# Altium PCB Strathim PCB V1.0 (1 try).PcbDoc (part 2 of 2)
Units mm, origin at the board's own origin, x right, y up, seen from the top; angles counter-clockwise.
Board outline 35 x 35 mm, 6 copper layers (Component Side, Ground Plane (GND), Inner Layer 1, Inner Layer 2, Power Plane (VCC), Solder Side), stack 1.297 mm thick; 113 components, 148 nets, 686 pads, 197 vias.
Unrouted connection lines stored in the file: 260.
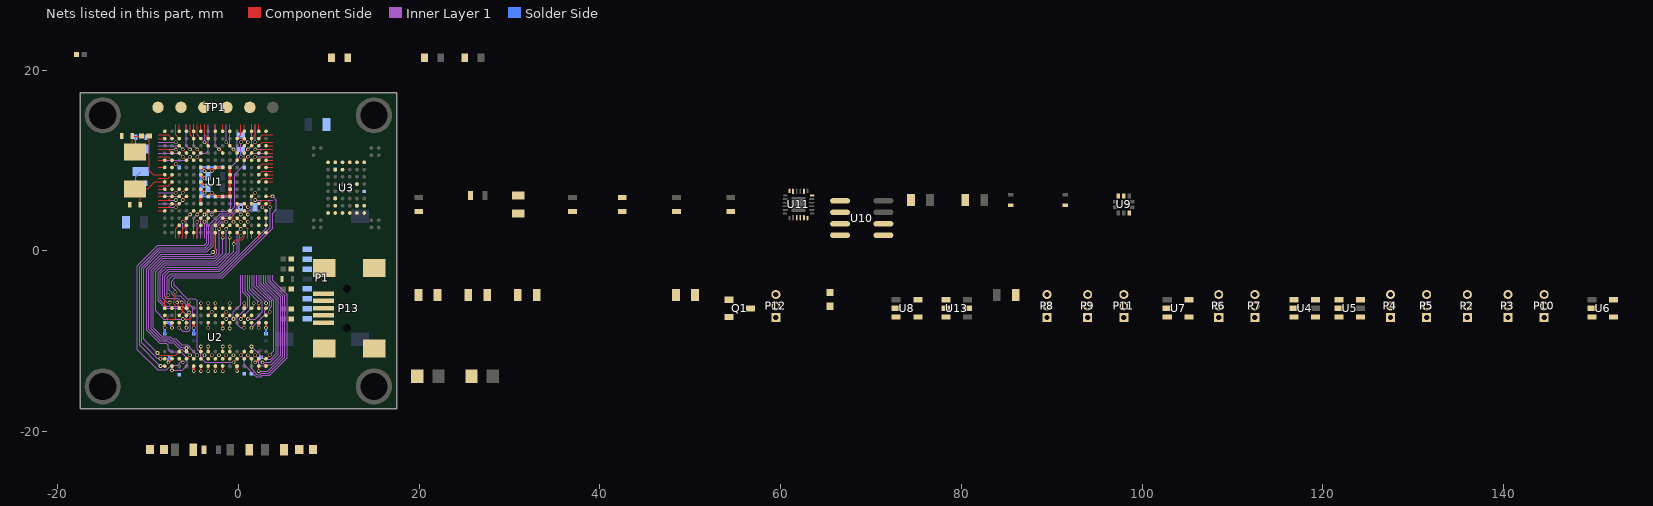
[diagram p5: the nets of this part, all layers, seen from the top]

## Via types
v1: diameter 0.4, hole 0.25, Component Side to Solder Side, tented both sides, 183 vias
v2: diameter 0.4, hole 0.25, Component Side to Solder Side, 14 vias

## Nets (pads, with @x,y where several pads share a name; then routed paths per layer and width w, separated by ;. In a path a pad name is that pad's centre, name@x,y a point inside that pad or via, vN(x,y) a via of type N, cw(c..) or ccw(c..) an arc to the next point about the centre after c; other vN are vias at no path point) (continued)
GND: C1.1 C2.1 C3.1 C4.1 C5.1 C6.1 C7.2 C8.1 C9.1 C10.1 C11.1 C12.1 C13.1 C14.1 C15.1 C16.1 C17.1 C18.1 C19.1 C20.1 C21.1 C22.1 C23.1 C24.1 C25.1 C26.1 C27.1 C28.1 C29.1 C30.2 C31.2 C32.2 C33.2 C34.1 C35.1 C36.1 C37.1 C38.1 C39.1 C40.1 C41.1 C42.1 C43.1 C44.1 C45.1 C46.1 C47.1 C48.1 C49.1 C50.1 C51.1 C52.1 C53.1 C54.1 C55.1 C56.1 C57.1 C58.1 C59.1 C60.1 C61.1 C62.1 J1.1 J2.1 P1.3 P2.3 P3.3 P4.3 P5.3 P6.3 P7.3 P8.3 P9.3 P10.3 P11.3 P12.3 P13.5 P13.6 P13.7 P13.8 P13.9 Q1.2 R3.1 TP1.3 U1.F2 U1.F6 U1.F7 U1.F8 U1.F9 U1.F10 U1.G6 U1.G10 U1.H6 U1.H10 U1.J6 U1.J10 U1.K6 U1.K7 U1.K8 U1.K9 U1.K10 U1.L6 U1.M1 U2.A3 U2.B3 U2.B8 U2.C1 U2.D1 U2.E9 U2.F1 U2.L3 U2.L9 U2.M1 U2.N1 U2.P3 U2.P8 U2.R3 U3.C5 U3.F7 U3.K3 U3.K8 U4.2 U5.2 U6.4 U7.4 U8.4 U9.3 U9.8 U9.9 U10.1 U10.2 U10.3 U10.4 U11.9 U11.11 U11.18 U11.20 U13.2 | length 44.2
  Component Side w0.12: -8.86,4.42 U1.M1@-8.22,4.42 ; U1.F2@-7.34,9.22 v1(-6.94,9.62) ; v1(-6.78,-5.71) -6.64,-5.85 -6.64,-6.25 U2.N1@-6.54,-6.35 ; U2.F1@-0.94,-6.35 v1(-0.94,-5.79) ; U2.C1@1.46,-6.35 1.7,-6.11 v1(1.7,-5.79)
  Component Side w0.254: v1(-8.14,-8.51) U2.R3@-8.14,-7.95 ; v1(-7.74,-12.35) U2.P8@-7.34,-11.95 ; v1(-7.34,-8.51) U2.P3@-7.34,-7.95 ; U2.M1@-5.74,-6.35 -5.415,-6.025 -5.5,-5.94 v1(-5.5,-5.7) ; v1(-4.94,-13.31) U2.L9@-4.94,-12.75 ; v1(-4.94,-8.51) U2.L3@-4.94,-7.95 ; U1.L6@-4.14,5.22 U1.K6@-4.14,6.02 ; U1.J6@-4.14,6.82 v1(-3.74,6.42) ; U1.H6@-4.14,7.62 v1(-3.74,7.22) ; U1.G6@-4.14,8.42 v1(-3.74,8.02) ; U1.F6@-4.14,9.22 v1(-3.74,8.82) ; U1.K7@-3.34,6.02 v1(-2.94,6.42) U1.K8@-2.54,6.02 U1.K9@-1.74,6.02 U1.K10@-0.94,6.02 U1.J10@-0.94,6.82 U1.H10@-0.94,7.62 U1.G10@-0.94,8.42 U1.F10@-0.94,9.22 ; U1.F7@-3.34,9.22 v1(-2.94,8.82) U1.F8@-2.54,9.22 U1.F9@-1.74,9.22 ; v1(-0.14,-13.31) U2.E9@-0.14,-12.75 ; U2.D1@0.66,-6.35 0.66,-5.87 v1(0.66,-5.79) ; v1(1.86,-12.35) U2.B8@2.26,-11.95 ; v1(2.26,-8.51) U2.B3@2.26,-7.95 ; v1(3.06,-8.51) U2.A3@3.06,-7.95
  Solder Side w0.12: v1(-6.94,9.62) -6.92,9.62 C26.1@-6.52,9.22
  Solder Side w0.254: C47.1@-8.14,-9.17 v1(-8.14,-8.51) ; v1(-7.74,-12.35) -7.74,-11.93 C46.1@-7.58,-11.77 ; C51.1@-7.74,-7.93 -7.34,-8.33 v1(-7.34,-8.51) ; C50.1@-5.74,-6.33 -5.415,-6.005 -5.5,-5.92 v1(-5.5,-5.7) ; C44.1@-4.96,-12.75 -4.96,-13.29 v1(-4.94,-13.31) ; C43.1@-4.94,-9.17 v1(-4.94,-8.51) ; C25.1@-4.16,5.22 -4.16,6 C20.1@-4.14,6.02 ; v1(-3.74,6.42) C20.1@-4.14,6.02 ; v1(-3.74,7.22) -4.14,6.82 C19.1@-4.16,6.82 ; v1(-3.74,8.02) -4.14,8.42 C27.1@-4.16,8.42 ; v1(-3.74,8.82) -4.14,9.22 C13.1@-4.16,9.22 ; C21.1@-3.34,6 C21.1@-3.34,6.02 ; v1(-2.94,6.42) C21.1@-3.34,6.02 ; C10.1@-1.74,9.24 C11.1@-2.54,9.24 C12.1@-3.34,9.24 -4.14,9.24 C13.1@-4.16,9.22 ; C9.1@-0.94,9.24 -0.92,9.22 C17.1@-0.92,8.42 C16.1@-0.92,7.62 C15.1@-0.92,6.82 C14.1@-0.92,6.02 C21.1@-3.34,6.02 ; v1(-0.14,-13.31) C42.1@-0.14,-12.83 ; C49.1@0.64,-6.35 0.66,-6.33 v1(0.66,-5.79) ; v1(1.86,-12.35) 1.92,-12.35 C39.1@2.5,-11.77 ; v1(2.26,-8.51) C48.1@2.26,-7.93 ; C38.1@3.06,-9.17 v1(3.06,-8.51) ; C19.1@-4.16,6.82 C28.1@-4.16,7.62 C27.1@-4.16,8.42 ; C19.1@-4.16,6.82 C20.1@-4.16,6.02 C20.1@-4.14,6.02 ; C27.1@-4.16,8.42 C13.1@-4.16,9.22 ; C20.1@-4.14,6.02 C21.1@-3.34,6.02
I2C1_SCL: R13.1 U10.6 U11.23
I2C1_SDA: R14.1 U10.5 U11.24
MAG_INT: 
MCU_TDI: U1.A13 | length 0.7
  Component Side w0.12: U1.A13@1.46,13.22 1.46,13.94
MPU9250_INT: U11.12
NAND_ALE: U1.M10 U3.C4 | length 1.4
  Component Side w0.12: U1.M10@-0.94,4.42 -0.54,4.02 v1(-0.54,3.22)
NAND_CLE: U1.N10 U3.D5
NAND_NCE: U1.D9 U3.C6 | length 3.5
  Component Side w0.12: v1(-2.14,11.22) U1.D9@-1.74,10.82
  Inner Layer 1 w0.12: -2.54,13.94 -2.54,11.62 v1(-2.14,11.22)
NAND_NR/B: U1.B11 U3.C8 | length 1.7
  Component Side w0.12: U1.B11@-0.14,12.42 0.26,12.82 0.26,13.94
NAND_NRE: U1.D11 U3.D4 | length 3.5
  Component Side w0.12: v1(-0.54,11.22) U1.D11@-0.14,10.82
  Inner Layer 1 w0.12: -0.94,13.94 -0.94,11.62 v1(-0.54,11.22)
NAND_NWE: U1.C10 U1.J3 U2.K8 U3.C7 | length 5.5
  Component Side w0.12: v1(-6.94,6.42) U1.J3@-6.54,6.82 ; U2.K8@-4.14,-11.95 v1(-3.74,-11.55) ; v1(-1.34,12.02) U1.C10@-0.94,11.62
  Inner Layer 1 w0.12: -8.86,6.42 v1(-6.94,6.42) ; v1(-1.34,12.02) -1.34,13.94
NAND_NWP: U1.M12 U3.C3 | length 0.6
  Component Side w0.12: U1.M12@0.66,4.42 v1(1.06,4.02)
NetC1_2: C1.2 U1.E1 X1.1 | length 2.3
  Component Side w0.12: -8.86,10.02 U1.E1@-8.14,10.02
  Solder Side w0.12: C1.2@-11.375,12.573 -11.375,11.855 X1.1@-10.795,11.275
NetC2_2: C2.2 U1.F1 X1.2 | length 2.2
  Component Side w0.12: -8.86,9.22 U1.F1@-8.14,9.22
  Solder Side w0.12: C2.2@-11.375,7.493 -11.375,8.195 X1.2@-10.795,8.775
NetC3_2: C3.2 U1.H1 X2.1 | length 4.9
  Component Side w0.12: C3.2@-10.85,5.08 -10.85,6.768 -10.922,6.84 -10.051,6.84 -9.271,7.62 U1.H1@-8.14,7.62
NetC4_2: C4.2 R4.2 X2.2 | length 2.9
  Component Side w0.12: X2.2@-11.43,10.94 -11.739,11.249 C4.2@-11.739,12.7 R4.2@-10.712,12.7
NetC6_2: C6.2 U1.L11 | length 0.6
  Component Side w0.12: U1.L11@-0.14,5.22 v1(0.26,4.82)
NetC8_2: C8.2 U1.E11 | length 1.4
  Component Side w0.12: U1.E11@-0.14,10.02 v1(0.26,10.42)
  Solder Side w0.12: v1(0.26,10.42) C8.2@0.26,11.22
NetC59_2: C59.2 U11.10
NetC62_2: C62.2
NetJ1_2: J1.2 R11.2 U1.E5 | length 4.3
  Component Side w0.12: v1(-5.34,10.42) U1.E5@-4.94,10.02
  Inner Layer 1 w0.12: -8.86,10.02 -5.74,10.02 v1(-5.34,10.42)
NetJ2_2: J2.2 R12.2 U1.E6 | length 4.9
  Component Side w0.12: v1(-4.54,10.42) U1.E6@-4.14,10.02
  Inner Layer 1 w0.12: v1(-4.54,10.42) -4.14,10.82 -3.603,10.82 -3.34,11.083 -3.34,13.94
NetLED6_1: LED6.1 Q1.1
NetLED6_2: LED6.2 R15.2
NetP10_1: P10.1 U6.2
NetP11_1: P11.1 U7.2
NetP12_1: P12.1 U8.2
NetP13_4: P13.4 R19.2
NetQ1_3: Q1.3 R16.1
NetR4_1: R4.1 U1.G1 | length 5.8
  Component Side w0.12: R4.1@-9.862,12.7 -9.862,8.846 -9.436,8.42 -8.86,8.42 U1.G1@-8.14,8.42
NRESET: TP1.5 U1.J1 | length 0.7
  Component Side w0.12: -8.86,6.82 U1.J1@-8.14,6.82
QUADSPI_BK1_IO0: U1.L3 | length 2.4
  Component Side w0.12: v1(-6.94,4.82) U1.L3@-6.54,5.22
  Inner Layer 1 w0.12: -8.86,4.82 v1@-7.02,4.82
QUADSPI_BK1_IO1: U1.L2 | length 1.6
  Component Side w0.12: -8.86,4.82 -7.82,4.82 ; -7.74,4.82 U1.L2@-7.34,5.22
QUADSPI_BK1_IO2: U1.A3 | length 0.7
  Component Side w0.12: U1.A3@-6.54,13.22 -6.54,13.94
QUADSPI_BK1_IO3: U1.M11 | length 0.6
  Component Side w0.12: U1.M11@-0.14,4.42 v1(0.26,4.02)
QUADSPI_CLK: U1.M5 | length 3.4
  Component Side w0.12: v1(-5.34,4.02) U1.M5@-4.94,4.42
  Inner Layer 1 w0.12: -5.74,1.38 -5.74,3.62 v1(-5.34,4.02)
QUADSPI_NCS: P10.2 U1.B6 U6.3 | length 1.7
  Component Side w0.12: -4.54,13.94 -4.54,12.82 U1.B6@-4.14,12.42
RAM_ADDR0: U1.D2 U2.G8 | length 2.3
  Component Side w0.12: -8.86,11.22 -7.74,11.22 U1.D2@-7.34,10.82 ; U2.G8@-1.74,-11.95 v1(-1.34,-11.55)
RAM_ADDR1: U1.E2 U2.G9 | length 2.2
  Component Side w0.12: -8.86,10.42 -7.74,10.42 U1.E2@-7.34,10.02 ; v1(-1.74,-13.31) U2.G9@-1.74,-12.75
RAM_ADDR2: U1.G2 U2.F7 | length 2.2
  Component Side w0.12: -8.86,8.02 -7.74,8.02 U1.G2@-7.34,8.42 ; U2.F7@-0.94,-11.15 v1(-0.94,-10.59)
RAM_ADDR3: U1.H2 U2.F3 | length 2.3
  Component Side w0.12: -8.86,7.22 -7.74,7.22 U1.H2@-7.34,7.62 ; v1(-0.94,-8.59) U2.F3@-0.94,-7.95
RAM_ADDR4: U1.J2 U2.G1
RAM_ADDR5: U1.K3 U2.G2 | length 3.1
  Component Side w0.12: v1(-6.94,5.62) U1.K3@-6.54,6.02 ; U2.G2@-1.74,-7.15 v1(-1.34,-6.75)
  Inner Layer 1 w0.12: -8.86,5.62 v1(-6.94,5.62)
RAM_ADDR6: U1.M6 U2.G3 | length 4
  Component Side w0.12: v1(-4.54,4.02) U1.M6@-4.14,4.42 ; v1(-1.74,-8.59) U2.G3@-1.74,-7.95
  Inner Layer 1 w0.12: -4.94,1.38 -4.94,3.62 v1(-4.54,4.02)
RAM_ADDR7: U1.N6 U2.H1 | length 3
  Component Side w0.12: v1(-4.54,3.22) U1.N6@-4.14,3.62 ; U2.H1@-2.54,-6.35 v1(-2.54,-5.79)
  Inner Layer 1 w0.12: -4.54,1.38 v1(-4.54,3.22)
RAM_ADDR8: U1.P6 U2.H2 | length 1.6
  Component Side w0.12: -4.54,1.38 -4.54,2.42 U1.P6@-4.14,2.82
RAM_ADDR9: U1.M8 U2.J3 | length 1.1
  Component Side w0.12: v1(-3.34,-8.51) U2.J3@-3.34,-7.95 ; v1(-2.94,4.02) U1.M8@-2.54,4.42
RAM_ADDR10: U1.N7 U2.G7 | length 3
  Component Side w0.12: v1(-3.74,3.22) U1.N7@-3.34,3.62 ; U2.G7@-1.74,-11.15 v1(-1.74,-10.59)
  Inner Layer 1 w0.12: -3.74,1.38 v1(-3.74,3.22)
RAM_ADDR11: U1.M7 U2.H9 | length 3.9
  Component Side w0.12: v1(-3.74,4.02) U1.M7@-3.34,4.42 ; v1(-2.54,-13.31) U2.H9@-2.54,-12.75
  Inner Layer 1 w0.12: -4.14,1.38 -4.14,3.62 v1(-3.74,4.02)
RAM_I/O0: U1.L12 U2.R8 U3.H4 | length 28.3
  Component Side w0.12: v1(-8.62,-11.95) U2.R8@-8.14,-11.95 ; U1.L12@0.66,5.22 v2(1.06,4.82)
  Inner Layer 1 w0.12: v1(-8.62,-11.95) -8.932,-11.95 -10.696,-10.186 -10.696,-1.85 -8.732,0.114 -3.588,0.114 -3.02,0.682 -3.02,2.724 -1.884,3.86 -1.02,3.86 -0.12,4.76 -0.12,4.977 0.103,5.2 0.68,5.2 v2(1.06,4.82)
RAM_I/O1: U1.K13 U2.N7 U3.J4 | length 31
  Component Side w0.12: v1(-8.94,-11.31) -8.715,-11.535 -6.925,-11.535 U2.N7@-6.54,-11.15 ; U1.K13@1.46,6.02 v1(1.86,6.42)
  Inner Layer 1 w0.12: v1(-8.94,-11.31) -10.456,-9.794 -10.456,-1.949 -8.633,-0.126 -3.488,-0.126 -2.78,0.582 -2.78,2.624 -1.784,3.62 -0.921,3.62 -0.101,4.44 1.217,4.44 1.44,4.663 1.44,6 v1(1.86,6.42)
RAM_I/O2: U1.B12 U2.R9 U3.K4 | length 35.2
  Component Side w0.12: v1(-8.62,-12.75) U2.R9@-8.14,-12.75 ; v2(0.26,12.02) U1.B12@0.66,12.42
  Inner Layer 1 w0.12: v1(-8.62,-12.75) -10.936,-10.434 -10.936,-1.75 -8.832,0.354 -3.687,0.354 -3.26,0.781 -3.26,2.823 -1.983,4.1 -1.18,4.1 -0.38,4.9 -0.38,8.481 0.64,9.501 0.64,10.577 0.26,10.957 v2(0.26,12.02)
RAM_I/O3: U1.C12 U2.N8 U3.K5 | length 40.8
  Component Side w0.12: U2.N8@-6.54,-11.95 v1(-6.14,-12.35) ; U1.C12@0.66,11.62 v1(1.06,12.02)
  Inner Layer 1 w0.12: v1(-6.14,-12.35) -6.403,-12.35 -6.783,-12.73 -7.48,-12.73 -7.98,-13.23 -8.868,-13.23 -11.176,-10.922 -11.176,-1.651 -8.931,0.594 -3.787,0.594 -3.5,0.881 -3.5,2.923 -3.36,3.063 -3.36,4.137 -3.097,4.4 -1.299,4.4 -0.86,4.839 -0.86,5.3 -0.86,9.22 -0.12,9.96 -0.12,12.317 0.02,12.457 0.623,12.457 v1(1.06,12.02)
RAM_I/O4: U1.R8 U2.P9 U3.K6 | length 26.4
  Component Side w0.12: v1(-7.34,-13.23) U2.P9@-7.34,-12.75 ; v2(-2.794,-0.127) -2.54,0.127 U1.R8@-2.54,2.02
  Inner Layer 1 w0.12: v1(-7.34,-13.23) -6.22,-13.23 -5.66,-12.67 -5.66,-11.87 -6.38,-11.15 -7.5,-11.15 -7.74,-10.91 -7.74,-10.453 -7.983,-10.21 -8.718,-10.21 -10.16,-8.768 -10.16,-1.993 -8.533,-0.366 -3.033,-0.366 v2(-2.794,-0.127)
RAM_I/O5: U1.N9 U2.M8 U3.J7 | length 26
  Component Side w0.12: U2.M8@-5.74,-11.95 v1(-5.34,-11.55) ; U1.N9@-1.74,3.62 v2(-1.34,3.22)
  Inner Layer 1 w0.12: v1(-5.34,-11.55) -5.76,-11.13 -6.061,-11.13 -6.281,-10.91 -6.479,-10.91 -7.204,-10.185 -7.668,-10.185 -7.883,-9.97 -8.619,-9.97 -9.906,-8.683 -9.906,-2.078 -8.434,-0.606 -2.736,-0.606 -2.414,-0.284 -2.414,0.128 -2.504,0.218 -2.504,2.561 -2.281,2.784 -1.845,3.22 v2(-1.34,3.22)
RAM_I/O6: U1.P9 U2.M7 U3.K7 | length 23.2
  Component Side w0.12: U2.M7@-5.74,-11.15 v1(-5.74,-10.75) ; v2(-2.124,2.404) -2.124,2.436 U1.P9@-1.74,2.82
  Inner Layer 1 w0.12: v1(-5.74,-10.75) -6.101,-10.75 -6.181,-10.67 -6.38,-10.67 -7.105,-9.945 -7.505,-9.945 -7.72,-9.73 -8.519,-9.73 -9.652,-8.597 -9.652,-2.163 -8.335,-0.846 -2.636,-0.846 -2.124,-0.334 v2(-2.124,2.404)
RAM_I/O7: U1.R9 U2.L8 U3.J8 | length 23.8
  Component Side w0.12: U2.L8@-4.94,-11.95 v1(-4.54,-11.55) ; v2(-1.74,1.46) U1.R9@-1.74,2.02
  Inner Layer 1 w0.12: v1(-4.54,-11.55) -5.36,-10.73 -5.36,-10.593 -5.583,-10.37 -6.28,-10.37 -6.945,-9.705 -7.34,-9.705 -7.555,-9.49 -8.42,-9.49 -9.398,-8.512 -9.398,-2.249 -8.235,-1.086 -2.537,-1.086 -1.74,-0.289 v2(-1.74,1.46)
RAM_I/O8: U1.P10 U2.L2 | length 21
  Component Side w0.12: v1(-6.14,-7.55) -5.387,-7.55 -4.987,-7.15 U2.L2@-4.94,-7.15 ; v2(-1.34,2.42) U1.P10@-0.94,2.82
  Inner Layer 1 w0.12: v1(-6.14,-7.55) -8.25,-7.55 -9.144,-6.656 -9.144,-2.334 -8.136,-1.326 -2.437,-1.326 -1.36,-0.249 -1.36,2.4 v2(-1.34,2.42)
RAM_I/O9: U1.R10 U2.M3 | length 20
  Component Side w0.12: v1(-5.74,-8.51) U2.M3@-5.74,-7.95 ; v2(-0.94,1.46) U1.R10@-0.94,2.02
  Inner Layer 1 w0.12: v1(-5.74,-8.51) -5.74,-7.07 -6.46,-6.35 -8.079,-6.35 -8.89,-5.539 -8.89,-2.42 -8.036,-1.566 -2.338,-1.566 -0.94,-0.168 v2(-0.94,1.46)
RAM_I/O10: U1.R12 U2.M2 | length 19.3
  Component Side w0.12: U2.M2@-5.74,-7.15 v1(-5.42,-6.83) ; v2(-0.508,0.762) -0.508,1.016 -0.284,1.24 0.417,1.24 0.64,1.463 0.64,2 U1.R12@0.66,2.02
  Inner Layer 1 w0.12: v1(-5.42,-6.83) -6.14,-6.11 -7.98,-6.11 -8.636,-5.454 -8.636,-2.505 -7.937,-1.806 -2.239,-1.806 -0.508,-0.075 v2(-0.508,0.762)
RAM_I/O11: U1.P11 U2.P1 | length 16.8
  Component Side w0.12: v1(-7.58,-5.71) -7.58,-6.11 U2.P1@-7.34,-6.35 ; U1.P11@-0.14,2.82 v2(0.26,2.42)
  Inner Layer 1 w0.12: v1(-7.58,-5.71) -7.904,-5.71 -8.382,-5.232 -8.382,-2.667 -7.761,-2.046 -2.139,-2.046 -0.127,-0.034 -0.127,2.033 v2(0.26,2.42)
RAM_I/O12: U1.R11 U2.N2 | length 17.8
  Component Side w0.12: U2.N2@-6.54,-7.15 -6.155,-6.765 ; v1(-6.26,-5.71) -6.22,-5.71 -6.155,-5.775 -6.155,-6.735 ; U1.R11@-0.14,2.02 v2(0.26,1.62) ; -6.155,-6.765 -6.155,-6.735 ; -6.155,-6.765 -6.14,-6.75 -6.155,-6.735
  Inner Layer 1 w0.12: v1(-6.26,-5.71) -6.26,-5.67 -6.698,-5.232 -7.903,-5.232 -8.127,-5.008 -8.127,-4.852 -8.128,-4.851 -8.128,-2.794 -7.62,-2.286 -2.04,-2.286 0.113,-0.133 0.113,1.473 v2(0.26,1.62)
RAM_I/O13: U1.L15 U2.R1 | length 20
  Component Side w0.12: U2.R1@-8.14,-6.35 -8.14,-5.371 -7.747,-4.978 v1(-7.747,-4.851) ; v2(2.66,4.82) U1.L15@3.06,5.22
  Inner Layer 1 w0.12: v1(-7.747,-4.851) -7.874,-4.851 -7.874,-2.921 -7.479,-2.526 -1.94,-2.526 3.06,2.474 3.06,4.42 v2(2.66,4.82)
RAM_I/O14: U1.L14 U2.N3 | length 27.3
  Component Side w0.12: v1(-6.54,-8.51) U2.N3@-6.54,-7.95 ; U1.L14@2.26,5.22 2.66,5.62 3.22,5.62 3.54,5.3 v2(3.54,4.82)
  Inner Layer 1 w0.12: v1(-6.54,-8.51) -6.14,-8.91 -5.5,-8.91 -5.32,-8.73 -5.32,-7.267 -5.04,-6.987 -5.04,-6.33 -5.29,-6.08 -5.657,-6.08 -5.88,-5.857 -5.88,-5.513 -6.415,-4.978 -7.141,-4.978 -7.365,-4.754 -7.365,-4.598 -7.62,-4.343 -7.62,-3.09 -7.296,-2.766 -1.841,-2.766 3.54,2.615 v2(3.54,4.82)
RAM_I/O15: U1.K15 U2.R2 | length 23.9
  Component Side w0.12: U2.R2@-8.14,-7.15 -7.74,-7.55 -7.1,-7.55 -6.94,-7.39 -6.94,-6.087 -7.16,-5.867 -7.16,-5.534 -6.985,-5.359 v1(-6.985,-4.597) ; U1.K15@3.06,6.02 v2(3.78,6.02)
  Inner Layer 1 w0.12: v1(-6.985,-4.597) -6.985,-4.343 -7.366,-3.962 -7.366,-3.344 -7.028,-3.006 -1.742,-3.006 3.78,2.516 3.78,4.161 4.191,4.572 4.191,5.609 v2(3.78,6.02)
RAM_I/O16: U1.P14 U2.E8 | length 14.5
  Component Side w0.12: v1(-0.525,-12.335) U2.E8@-0.14,-11.95
  Inner Layer 1 w0.12: -7.112,-3.429 -7.112,-3.835 -5.651,-5.296 -4.817,-5.296 -4.56,-5.553 -4.56,-10.89 -4.14,-11.31 -4.14,-11.87 -3.675,-12.335 v1(-0.525,-12.335)
RAM_I/O17: U1.N14 U2.D7 | length 17.7
  Component Side w0.12: v1(0.26,-11.55) U2.D7@0.66,-11.15
  Inner Layer 1 w0.12: v1(0.26,-11.55) 0.68,-11.97 0.68,-12.607 2.003,-13.93 2.517,-13.93 2.657,-13.79 3.454,-13.79 5.391,-11.853 5.391,-4.86 3.81,-3.279 3.81,-2.692
RAM_I/O18: U1.P15 U2.D8 | length 16.7
  Component Side w0.12: U2.D8@0.66,-11.95 v1(1.06,-11.55)
  Inner Layer 1 w0.12: v1(1.06,-11.55) 1.48,-11.97 1.48,-13.067 2.103,-13.69 2.417,-13.69 2.557,-13.55 3.355,-13.55 5.151,-11.754 5.151,-4.959 3.556,-3.364 3.556,-2.692
RAM_I/O19: U1.N15 U2.B9 | length 13.5
  Component Side w0.12: v1(2.26,-13.31) U2.B9@2.26,-12.75
  Inner Layer 1 w0.12: v1(2.26,-13.31) 3.256,-13.31 4.911,-11.655 4.911,-5.059 3.302,-3.45 3.302,-2.692
RAM_I/O20: U1.M15 U2.C8 | length 14.2
  Component Side w0.12: U2.C8@1.46,-11.95 v1(1.86,-11.55)
  Inner Layer 1 w0.12: v1(1.86,-11.55) 2.28,-11.97 2.28,-12.507 2.503,-12.73 2.817,-12.73 2.957,-12.59 3.636,-12.59 4.671,-11.555 4.671,-5.158 3.034,-3.521 3.034,-2.692
RAM_I/O21: U1.E12 U2.A9 | length 15.6
  Component Side w0.12: U1.E12@0.66,10.02 v1(1.06,10.42) ; v1(2.66,-12.35) U2.A9@3.06,-12.75
  Inner Layer 1 w0.12: v1(1.06,10.42) 1.46,10.82 3.78,10.82 ; v1(2.66,-12.35) 3.537,-12.35 4.431,-11.456 4.431,-5.257 2.794,-3.62 2.794,-2.692
RAM_I/O22: U1.E13 U2.C7 | length 16
  Component Side w0.12: U2.C7@1.46,-11.15 v1(1.46,-10.59) ; U1.E13@1.46,10.02 v1(1.86,10.42)
  Inner Layer 1 w0.12: v1(1.46,-10.59) 2.84,-11.97 3.577,-11.97 4.191,-11.356 4.191,-5.357 2.54,-3.706 2.54,-2.692 ; v1(1.86,10.42) 3.78,10.42
RAM_I/O23: U1.D13 U2.A8 | length 12.8
  Component Side w0.12: U1.D13@1.46,10.82 v1(1.86,11.22) ; U2.A8@3.06,-11.95 v1(3.46,-11.55)
  Inner Layer 1 w0.12: v1(1.86,11.22) 3.78,11.22 ; 2.286,-2.692 2.286,-3.791 3.94,-5.445 3.94,-11.07 v1(3.46,-11.55)
RAM_I/O24: U1.E14 U2.A2 | length 7.1
  Component Side w0.12: U1.E14@2.26,10.02 2.66,10.42 3.78,10.42 ; U2.A2@3.06,-7.15 v1(3.46,-6.75)
  Inner Layer 1 w0.12: 2.032,-2.692 2.032,-3.877 3.7,-5.545 3.7,-6.129 3.46,-6.369 v1(3.46,-6.75)
RAM_I/O25: U1.D14 U2.C3 | length 9.6
  Component Side w0.12: v1(1.46,-8.51) U2.C3@1.46,-7.95 ; U1.D14@2.26,10.82 2.66,11.22 3.78,11.22
  Inner Layer 1 w0.12: v1(1.46,-8.51) 2.9,-7.07 2.9,-6.59 3.46,-6.03 3.46,-5.644 1.778,-3.962 1.778,-2.692
RAM_I/O26: U1.C14 U2.A1 | length 6
  Component Side w0.12: U1.C14@2.26,11.62 2.66,12.02 3.78,12.02 ; U2.A1@3.06,-6.35 v1(3.06,-5.79)
  Inner Layer 1 w0.12: 1.524,-2.692 1.524,-4.177 3.06,-5.713 v1(3.06,-5.79)
RAM_I/O27: U1.C13 U2.C2 | length 9.6
  Component Side w0.12: v1(1.06,-7.55) U2.C2@1.46,-7.15 ; U1.C13@1.46,11.62 v1(1.86,12.02)
  Inner Layer 1 w0.12: v1(1.06,-7.55) 1.86,-7.55 2.66,-6.75 2.66,-5.653 1.27,-4.263 1.27,-2.692 ; v1(1.86,12.02) 1.86,13.94
RAM_I/O28: U1.D6 U2.B1 | length 7.6
  Component Side w0.12: v1(-4.54,11.22) U1.D6@-4.14,10.82 ; U2.B1@2.26,-6.35 v1(2.26,-5.79)
  Inner Layer 1 w0.12: -4.94,13.94 -4.94,11.62 v1(-4.54,11.22) ; 1.016,-2.692 1.016,-4.426 2.26,-5.67 v1(2.26,-5.79)
RAM_I/O29: U1.D4 U2.D2 | length 9.5
  Component Side w0.12: v1(-6.14,11.22) U1.D4@-5.74,10.82 ; v1(0.26,-7.55) U2.D2@0.66,-7.15
  Inner Layer 1 w0.12: -8.86,11.62 -6.54,11.62 v1(-6.14,11.22) ; v1(0.26,-7.55) 1.28,-6.53 1.28,-5.03 0.762,-4.512 0.762,-2.692
RAM_I/O30: U1.E4 U2.D3 | length 11.1
  Component Side w0.12: v1(-6.14,10.42) U1.E4@-5.74,10.02 ; v1(0.66,-8.51) U2.D3@0.66,-7.95
  Inner Layer 1 w0.12: -8.86,10.82 -6.54,10.82 v1(-6.14,10.42) ; 0.508,-2.692 0.508,-4.597 1.04,-5.129 1.04,-6.173 -0.12,-7.333 -0.12,-8.13 0.26,-8.51 v1(0.66,-8.51)
RAM_I/O31: U1.D5 U2.E2 | length 9.2
  Component Side w0.12: v1(-5.34,11.22) U1.D5@-4.94,10.82 ; v1(-0.54,-7.55) U2.E2@-0.14,-7.15
  Inner Layer 1 w0.12: -5.74,13.94 -5.74,11.62 v1(-5.34,11.22) ; v1(-0.54,-7.55) -0.54,-6.75 0.254,-5.956 0.254,-2.692
SDMMC_CK: P1.4 R8.1 U1.A12 | length 0.7
  Component Side w0.12: U1.A12@0.66,13.22 0.66,13.94
SDMMC_CMD: P1.6 R7.1 U1.D12 | length 3.5
  Component Side w0.12: U1.D12@0.66,10.82 v1(1.06,11.22)
  Inner Layer 1 w0.12: v1(1.06,11.22) 1.46,11.62 1.46,13.94
SDMMC_D0: P1.2 R9.1 U1.G14 | length 1.7
  Component Side w0.12: U1.G14@2.26,8.42 2.66,8.82 3.78,8.82
SDMMC_D1: P1.1 R10.1 U1.F14 | length 1.7
  Component Side w0.12: U1.F14@2.26,9.22 2.66,9.62 3.78,9.62
SDMMC_D2: P1.8 R5.1 U1.B14 | length 1.7
  Component Side w0.12: U1.B14@2.26,12.42 2.66,12.82 3.78,12.82
SDMMC_D3: P1.7 R6.1 U1.B13 | length 1.7
  Component Side w0.12: U1.B13@1.46,12.42 1.86,12.82 1.86,13.94
SDRAM_BA0: U1.N12 U2.J7 | length 1.1
  Component Side w0.12: U2.J7@-3.34,-11.15 v1(-3.34,-10.59) ; U1.N12@0.66,3.62 v1(1.06,3.22)
SDRAM_BA1: U1.N11 U2.H8 | length 1.1
  Component Side w0.12: U2.H8@-2.54,-11.95 v1(-2.14,-11.55) ; U1.N11@-0.14,3.62 v1(0.26,3.22)
SDRAM_CKE: U1.K4 U2.J2 | length 4
  Component Side w0.12: v1(-6.14,5.62) U1.K4@-5.74,6.02 ; U2.J2@-3.34,-7.15 v1(-2.94,-6.75)
  Inner Layer 1 w0.12: -8.86,5.22 -6.54,5.22 v1(-6.14,5.62)
SDRAM_CLK: U1.H14 U2.J1 | length 2.2
  Component Side w0.12: U2.J1@-3.34,-6.35 v1(-3.34,-5.79) ; U1.H14@2.26,7.62 2.66,8.02 3.78,8.02
SDRAM_DQM0: U1.A6 U2.K9 | length 1.3
  Component Side w0.12: v1(-4.14,-13.31) U2.K9@-4.14,-12.75 ; U1.A6@-4.14,13.22 -4.14,13.94
SDRAM_DQM1: U1.A5 U2.K1 | length 1.3
  Component Side w0.12: U1.A5@-4.94,13.22 -4.94,13.94 ; U2.K1@-4.14,-6.35 v1(-4.14,-5.79)
SDRAM_DQM2: U1.C3 U2.F8 | length 3.1
  Component Side w0.12: v1(-6.94,12.02) U1.C3@-6.54,11.62 ; U2.F8@-0.94,-11.95 v1(-0.54,-11.55)
  Inner Layer 1 w0.12: -8.86,12.02 v1(-6.94,12.02)
SDRAM_DQM3: U1.D3 U2.F2 | length 3.1
  Component Side w0.12: v1(-6.94,11.22) U1.D3@-6.54,10.82 ; v1(-1.34,-7.55) U2.F2@-0.94,-7.15
  Inner Layer 1 w0.12: -8.86,11.22 v1(-6.94,11.22)
SDRAM_NCAS: U1.B7 U2.K7 | length 2.2
  Component Side w0.12: U2.K7@-4.14,-11.15 v1(-4.14,-10.59) ; -3.74,13.94 -3.74,12.82 U1.B7@-3.34,12.42
SDRAM_NCS: U1.J4 U2.J8 | length 4
  Component Side w0.12: v1(-6.14,6.42) U1.J4@-5.74,6.82 ; U2.J8@-3.34,-11.95 v1(-2.94,-11.55)
  Inner Layer 1 w0.12: -8.86,6.02 -6.54,6.02 v1(-6.14,6.42)
SDRAM_NRAS: U1.P8 U2.J9 | length 0.6
  Component Side w0.12: v1(-3.34,-13.31) U2.J9@-3.34,-12.75
SERVO_CH0: P2.1 U1.F15 U4.3 | length 0.7
  Component Side w0.12: U1.F15@3.06,9.22 3.78,9.22
SERVO_CH1: P4.1 U1.E15 U4.4 | length 0.7
  Component Side w0.12: U1.E15@3.06,10.02 3.78,10.02
SERVO_CH2: P6.1 U1.D15 U4.6 | length 0.7
  Component Side w0.12: U1.D15@3.06,10.82 3.78,10.82
SERVO_CH3: P8.1 U1.C15 U4.1 | length 0.7
  Component Side w0.12: U1.C15@3.06,11.62 3.78,11.62
SERVO_CH4: P3.1 U1.P3 U5.3 | length 1.6
  Component Side w0.12: -6.94,1.38 -6.94,2.42 U1.P3@-6.54,2.82
SERVO_CH5: P5.1 U1.R3 U5.4 | length 0.6
  Component Side w0.12: -6.54,1.38 U1.R3@-6.54,2.02
SERVO_CH6: P7.1 U1.R5 U5.6 | length 0.6
  Component Side w0.12: -4.94,1.38 U1.R5@-4.94,2.02
SERVO_CH7: P9.1 U1.R4 U5.1 | length 0.6
  Component Side w0.12: -5.74,1.38 U1.R4@-5.74,2.02
SERVO_VBUS: P2.2 P3.2 P4.2 P5.2 P6.2 P7.2 P8.2 P9.2
SPI1_MISO: U1.A9 | length 0.7
  Component Side w0.12: U1.A9@-1.74,13.22 -1.74,13.94
SPI1_MOSI: U1.A8 | length 0.7
  Component Side w0.12: U1.A8@-2.54,13.22 -2.54,13.94
SPI1_NSS: U1.N4 | length 2.4
  Component Side w0.12: v1(-6.14,3.22) U1.N4@-5.74,3.62
  Inner Layer 1 w0.12: -6.14,1.38 v1(-6.14,3.22)
SPI1_SCK: U1.P4 | length 1.6
  Component Side w0.12: -6.14,1.38 -6.14,2.42 U1.P4@-5.74,2.82
SPI4_MISO: U1.B1 | length 0.7
  Component Side w0.12: -8.86,12.42 U1.B1@-8.14,12.42
SPI4_MOSI: U1.B2 | length 1.7
  Component Side w0.12: -8.86,12.82 -7.74,12.82 U1.B2@-7.34,12.42
SPI4_NSS: U1.A1
SPI6_MISO: U1.C7 | length 2.5
  Component Side w0.12: v1(-3.74,12.02) U1.C7@-3.34,11.62
  Inner Layer 1 w0.12: v1(-3.74,12.02) -3.74,13.94
SPI6_MOSI: U1.A4 | length 0.7
  Component Side w0.12: U1.A4@-5.74,13.22 -5.74,13.94
SPI6_SCK: U1.B3 | length 1.7
  Component Side w0.12: -6.94,13.94 -6.94,12.82 U1.B3@-6.54,12.42
SWCLK: R3.2 TP1.2 U1.A14 | length 0.7
  Component Side w0.12: U1.A14@2.26,13.22 2.26,13.94
SWDIO: R1.1 TP1.4 U1.A15
SWO: R2.1 TP1.6 U1.A10 | length 0.7
  Component Side w0.12: U1.A10@-0.94,13.22 -0.94,13.94
USART1_RX: U1.B5 U6.5 | length 1.7
  Component Side w0.12: -5.34,13.94 -5.34,12.82 U1.B5@-4.94,12.42
USART3_RX: U1.R13 U7.5 | length 0.6
  Component Side w0.12: 1.46,1.38 U1.R13@1.46,2.02
USART3_TX: P11.2 U1.P12 U7.3 | length 1.6
  Component Side w0.12: U1.P12@0.66,2.82 1.06,2.42 1.06,1.38
USART6_RX: U1.G15 U8.5 | length 0.7
  Component Side w0.12: U1.G15@3.06,8.42 3.78,8.42
USART6_TX: P12.2 U1.H15 U8.3 | length 0.7
  Component Side w0.12: U1.H15@3.06,7.62 3.78,7.62
USART7_RX: U1.K2 | length 1.7
  Component Side w0.12: -8.86,5.62 -7.74,5.62 U1.K2@-7.34,6.02
USART7_TX: U1.K1 | length 0.7
  Component Side w0.12: -8.86,6.02 U1.K1@-8.14,6.02
USB_HS_ID: R19.1 U1.L13 | length 2.5
  Component Side w0.12: U1.L13@1.46,5.22 v1(1.86,5.62)
  Inner Layer 1 w0.12: v1(1.86,5.62) 3.78,5.62
USB_HS_N: R17.1 U1.R14 | length 0.6
  Component Side w0.12: 2.26,1.38 U1.R14@2.26,2.02
USB_HS_P: R18.1 U1.R15
USBCON_N: P13.2 R17.2 U13.1
USBCON_P: P13.3 R18.2 U13.3
VBUS: P13.1 R16.2 U13.5
pads on no net: P1.0 P13.MH1 P13.MH2 U1.A2 U1.A7 U1.A11 U1.B8 U1.B9 U1.B10 U1.C2 U1.C4 U1.C5 U1.C6 U1.C8 U1.C9 U1.C11 U1.D1 U1.D7 U1.D8 U1.D10 U1.E3 U1.F3 U1.F12 U1.F13 U1.G3 U1.G4 U1.G12 U1.G13 U1.H3 U1.H4 U1.H12 U1.H13 U1.J12 U1.J13 U1.J14 U1.J15 U1.K12 U1.L1 U1.L4 U1.M2 U1.M9 U1.M13 U1.M14 U1.N1 U1.N5 U1.N8 U1.N13 U1.P1 U1.P5 U1.P7 U1.P13 U1.R6 U1.R7 U2.E3 U2.E7 U2.H3 U2.H7 U2.K2 U2.K3 U3.A1 U3.A2 U3.A9 U3.A10 U3.B1 U3.B9 U3.B10 U3.D6 U3.D7 U3.D8 U3.E3 U3.E4 U3.E5 U3.E6 U3.E7 U3.E8 U3.F3 U3.F4 U3.F5 U3.F6 U3.F8 U3.G3 U3.G5 U3.G6 U3.G7 U3.G8 U3.H3 U3.H5 U3.H6 U3.H7 U3.J3 U3.J5 U3.L1 U3.L2 U3.L9 U3.L10 U3.M1 U3.M2 U3.M9 U3.M10 U4.5 U5.5 U11.2 U11.3 U11.4 U11.5 U11.6 U11.7 U11.14 U11.15 U11.16 U11.17 U11.19 U11.21 U11.25 U13.4 U13.6
copper on no net: | length 92.7
  Component Side w0.12: -8.86,2.82 -8.22,2.82 ; -8.86,3.62 -8.22,3.62 ; -8.86,4.02 -7.74,4.02 -7.34,4.42 ; -8.86,5.22 -8.22,5.22 ; -8.86,8.82 -6.94,8.82 -6.54,9.22 ; -8.86,10.82 -8.14,10.82 ; -8.86,12.02 -7.74,12.02 -7.34,11.62 ; -7.34,13.22 -7.34,13.94 ; v1(-6.94,7.22) -6.54,7.62 ; v1(-6.94,8.02) -6.54,8.42 ; v1(-6.94,10.42) -6.54,10.02 ; v1(-6.14,4.82) -5.74,5.22 ; v1(-6.14,7.22) -5.74,7.62 ; v1(-6.14,8.02) -5.74,8.42 ; v1(-6.14,12.02) -5.74,11.62 ; -5.34,1.38 -5.34,2.42 -4.94,2.82 ; v1(-5.34,3.22) -4.94,3.62 ; v1(-5.34,12.02) -4.94,11.62 ; v1(-4.54,12.02) -4.14,11.62 ; -4.14,1.38 -4.14,2.02 ; -3.74,1.38 -3.74,2.42 -3.34,2.82 ; v1(-3.74,11.22) -3.34,10.82 ; -3.34,1.38 -3.34,2.02 ; -3.34,13.22 -3.34,13.94 ; v1(-2.94,11.22) -2.54,10.82 ; -2.94,13.94 -2.94,12.02 -2.54,11.62 ; -2.54,12.42 -2.14,12.82 -2.14,13.94 ; v1(-2.14,12.02) -1.74,11.62 ; -1.74,12.42 -1.34,12.82 -1.34,13.94 ; v1(-1.34,11.22) -0.94,10.82 ; -0.94,12.42 -0.54,12.82 -0.54,13.94 ; v1(-0.54,12.02) -0.14,11.62 ; -0.14,13.22 -0.14,13.94 ; 0.66,6.02 v1(1.06,5.62) ; 0.66,6.82 v1(1.06,6.42) ; 0.66,7.62 v1(1.06,7.22) ; 0.66,8.42 v1(1.06,8.02) ; 0.66,9.22 1.06,9.62 v1(1.076,9.636) ; 1.46,2.82 1.86,2.42 1.86,1.38 ; 1.46,3.62 v1(1.86,3.22) ; 1.46,4.42 v1(1.86,4.02) ; 1.46,6.82 v1(1.86,7.22) ; 1.46,7.62 v1(1.86,8.02) ; 1.46,8.42 v1(1.86,8.82) ; 1.46,9.22 v1(1.86,9.62) ; 2.26,4.42 v1(2.66,4.02) ; 2.26,6.82 2.66,7.22 3.78,7.22 ; 3.06,6.82 3.78,6.82
  Inner Layer 1 w0.12: -8.86,4.42 -6.54,4.42 v1(-6.14,4.82) ; -8.86,6.82 -6.54,6.82 v1(-6.14,7.22) ; -8.86,7.22 v1(-6.94,7.22) ; -8.86,7.62 -6.54,7.62 v1(-6.14,8.02) ; -8.86,8.02 v1(-6.94,8.02) ; -8.86,10.42 v1(-6.94,10.42) ; v1(-6.14,12.02) -6.14,13.94 ; -5.34,1.38 v1(-5.34,3.22) ; v1(-5.34,12.02) -5.34,13.94 ; v1(-4.54,12.02) -4.54,13.94 ; -4.14,13.94 -4.14,11.62 v1(-3.74,11.22) ; v1(-2.94,11.22) -2.94,13.94 ; v1(-2.14,12.02) -2.14,13.94 ; -1.74,13.94 -1.74,11.62 v1(-1.34,11.22) ; v1(-0.54,12.02) -0.54,13.94 ; v1(1.06,7.22) 1.46,6.82 3.78,6.82 ; v1(1.06,8.02) 1.46,7.62 3.78,7.62 ; v1(1.076,9.636) 1.46,10.02 3.78,10.02 ; v1(1.86,7.22) 3.78,7.22 ; v1(1.86,8.02) 3.78,8.02 ; v1(1.86,8.82) 3.78,8.82 ; v1(1.86,9.62) 3.78,9.62
  other v1: -6.14,8.02 -3.74,11.22

## Polygon pours and split planes (outlines as drawn)
GND on Ground Plane (GND) (split plane): 16.99,-16.99 -16.99,-16.99 -16.99,16.99 16.99,16.99
+3V3 on Power Plane (VCC) (split plane): 16.99,-16.99 -16.99,-16.99 -16.99,16.99 16.99,16.99

## Keep-outs
Keep-Out Layer:
  the board outline again, w0.5

## Other copper
Component Side:
  rectangle net GND: -4.14,6.02 -2.7,9.22
Solder Side:
  rectangle net GND: -4.16,6 -2.7,9.22

## Dimensions
-17.5,-17.5 to 17.5,-17.5 on Keep-Out Layer
17.5,17.5 to 17.5,-17.5 on Keep-Out Layer

## Text inside footprints (layer, text, board x,y; h text height)
P13: Mechanical 1 "PCB Edge" at 17.704,-10.386 h0.25 r90
U4: Mechanical 13 "1" at 116.451,-4.851 h0.6
U5: Mechanical 13 "1" at 121.451,-4.851 h0.6
U6: Mechanical 13 "1" at 149.451,-4.851 h0.6
U7: Mechanical 13 "1" at 102.451,-4.851 h0.6
U8: Mechanical 13 "1" at 72.451,-4.851 h0.6
U10: Mechanical 13 "1" at 65.292,5.276 h0.7; Mechanical 15 "1" at 66.308,6.165 h0.7
U13: Mechanical 13 "1" at 77.951,-4.851 h0.6